# Altium PCB 十六路输入.PcbDoc (part 2 of 3)
Units mm, origin at the board's own origin, x right, y up, seen from the top; angles counter-clockwise.
Board outline 122.4 x 87.4 mm, 2 copper layers (Top Layer, Bottom Layer); 111 components, 112 nets, 343 pads, 40 vias.
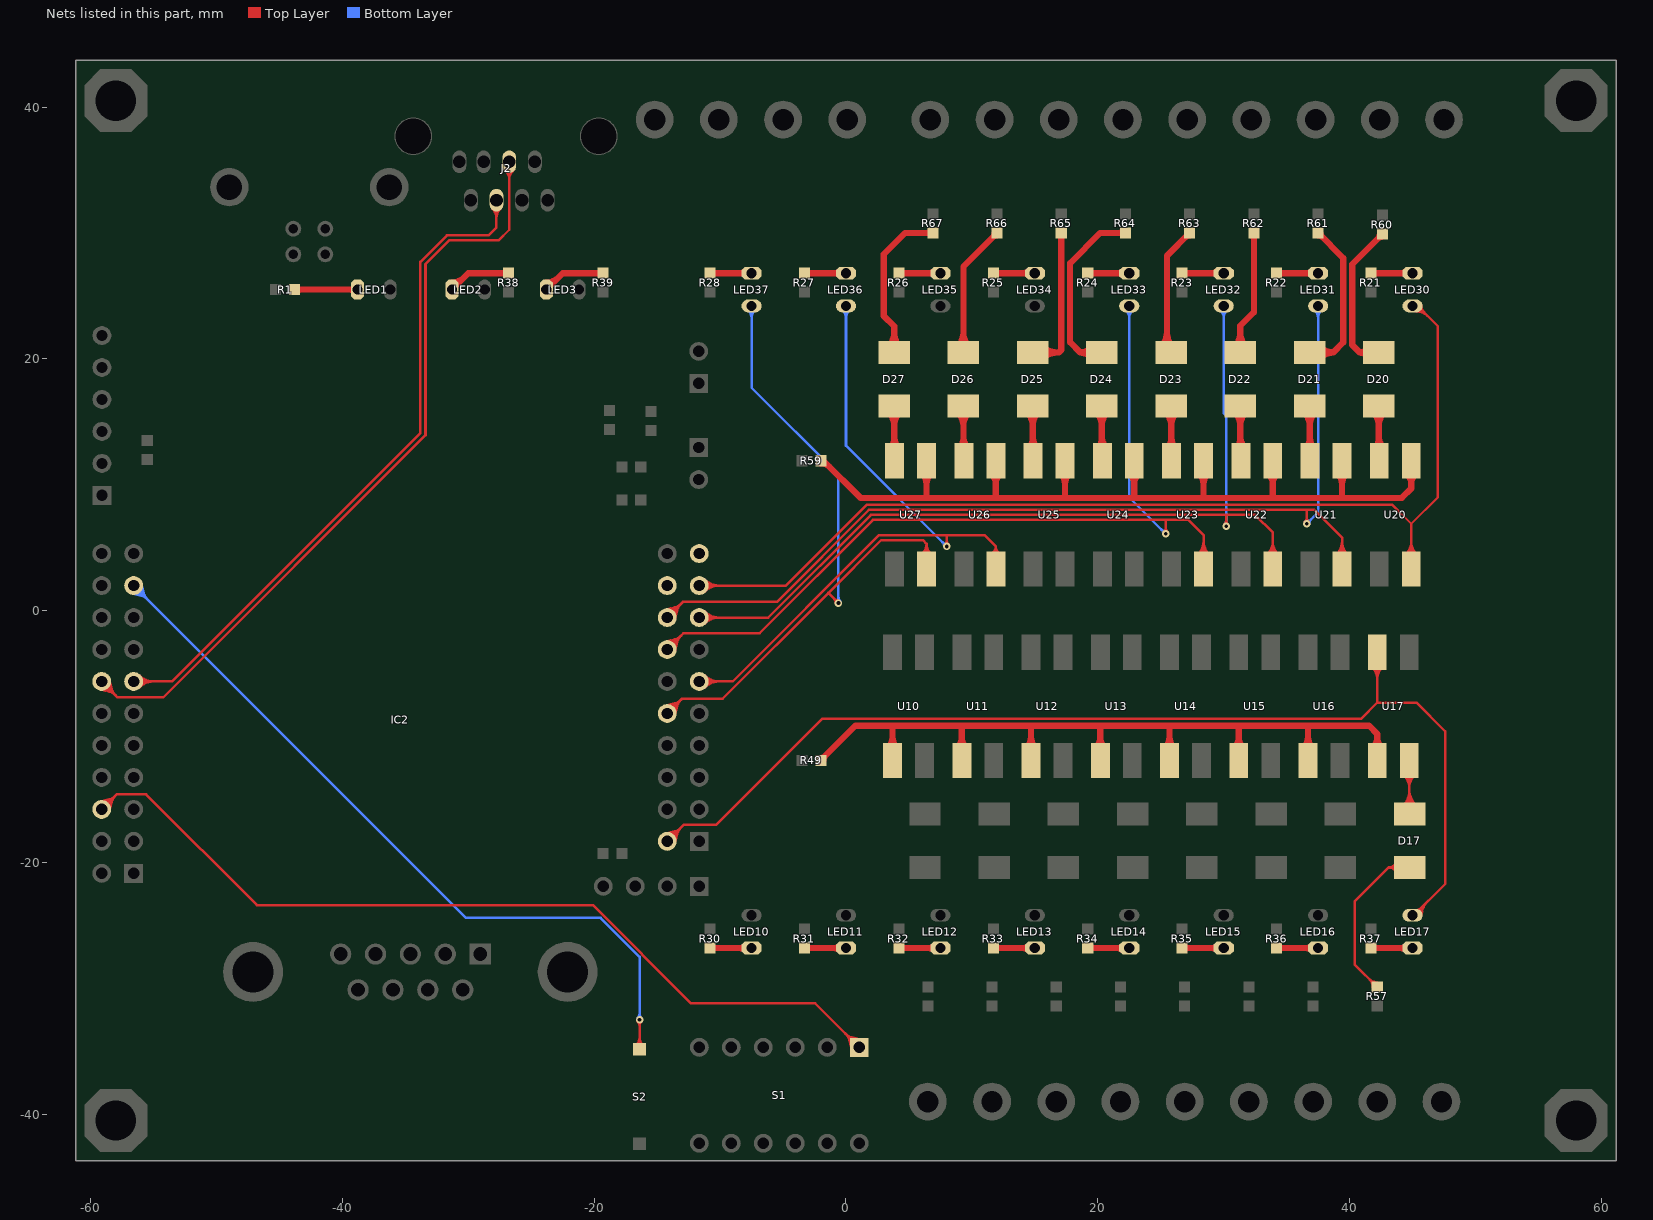
[diagram p2: the nets of this part, all layers, seen from the top]

## Via types
v1: diameter 0.6, hole 0.3, Top Layer to Bottom Layer, 40 vias

## Nets (pads, with @x,y where several pads share a name; then routed paths per layer and width w, separated by ;. In a path a pad name is that pad's centre, name@x,y a point inside that pad or via, vN(x,y) a via of type N, cw(c..) or ccw(c..) an arc to the next point about the centre after c; other vN are vias at no path point) (continued)
NetD17_A: D17.A U17.2 | length 25
  Top Layer w0.2: D17.A@44.74,-16.115 U17.2@44.74,-11.8 ; 44.74,-14.119 cw(c46.309,-14.119) 45.2,-13.01 ccw(c46.309,-14.119) 44.74,-14.119 ; 44.74,-14.119 ccw(c43.171,-14.119) 44.28,-13.01 cw(c43.171,-14.119) 44.74,-14.119 ; 44.74,-13.636 cw(c45.826,-13.636) 45.058,-12.868 ccw(c45.826,-13.636) 44.74,-13.636 ; 44.74,-13.636 ccw(c43.654,-13.636) 44.422,-12.868 cw(c43.654,-13.636) 44.74,-13.636 ; D17.A@44.209,-15.584 ccw(c42.928,-14.303) 44.74,-14.303 cw(c42.928,-14.303) D17.A@44.209,-15.584 ; D17.A@44.351,-15.726 ccw(c43.411,-14.786) 44.74,-14.786 cw(c43.411,-14.786) D17.A@44.351,-15.726 ; 44.74,-15.1 ccw(c45.825,-15.1) 45.058,-15.867 cw(c45.825,-15.1) 44.74,-15.1 ; 44.74,-14.617 ccw(c46.308,-14.617) 45.199,-15.726 cw(c46.308,-14.617) 44.74,-14.617 ; 44.74,-14.134 ccw(c46.791,-14.134) 45.341,-15.584 cw(c46.791,-14.134) 44.74,-14.134
NetD17_K: D17.K R57.1 | length 22.1
  Top Layer w0.2: R57.1@41.77,-29.565 ccw(c42.297,-29.424) R57.1@42.188,-29.959 ; R57.1@41.865,-29.47 cw(c41.724,-29.997) R57.1@42.259,-29.888 ; R57.1@42.2,-29.9 40.4,-28.1 40.4,-23.1 43.1,-20.4 ; D17.K@44.775,-20.4 43.1,-20.4 ; 41.62,-29.32 cw(c41.039,-29.9) 41.86,-29.9 ccw(c41.039,-29.9) 41.62,-29.32 ; 41.62,-29.32 ccw(c42.2,-28.739) 42.2,-29.56 cw(c42.2,-28.739) 41.62,-29.32 ; 43.1,-20.4 cw(c43.1,-21.097) 43.717,-20.773 ccw(c43.1,-21.097) 43.1,-20.4 ; 43.1,-20.4 ccw(c43.1,-19.703) 43.717,-20.027 cw(c43.1,-19.703) 43.1,-20.4 ; 43.431,-20.4 cw(c43.431,-20.923) 43.894,-20.679 ccw(c43.431,-20.923) 43.431,-20.4 ; 43.431,-20.4 ccw(c43.431,-19.877) 43.894,-20.121 cw(c43.431,-19.877) 43.431,-20.4
NetD20_A: D20.A U20.2 | length 13.1
  Top Layer w0.5: D20.A@42.325,16.25 42.325,11.935 U20.2@42.36,11.9 ; 42.325,14.681 cw(c43.894,14.681) 42.785,15.79 ccw(c43.894,14.681) 42.325,14.681 ; 42.325,14.681 ccw(c40.756,14.681) 41.865,15.79 cw(c40.756,14.681) 42.325,14.681 ; U20.2@42.006,12.904 ccw(c41.237,13.673) 42.325,13.673 cw(c41.237,13.673) U20.2@42.006,12.904 ; 42.325,13.842 ccw(c43.652,13.842) 42.714,12.904 cw(c43.652,13.842) 42.325,13.842
NetD20_K: D20.K R60.1 | length 16.6
  Top Layer w0.5: D20.K@42.325,20.5 40.8,20.5 ; R60.1@42.6,29.9 40.2,27.5 40.2,21.1 40.8,20.5 ; 40.8,20.5 cw(c40.8,19.763) 41.424,20.155 ccw(c40.8,19.763) 40.8,20.5 ; 40.8,20.5 ccw(c40.8,21.237) 41.424,20.845 cw(c40.8,21.237) 40.8,20.5 ; R60.1@42.276,29.576 cw(c42.6,29.251) 42.6,29.71 ccw(c42.6,29.251) R60.1@42.276,29.576 ; R60.1@42.276,29.576 ccw(c41.951,29.9) 42.41,29.9 cw(c41.951,29.9) R60.1@42.276,29.576
NetD21_A: D21.A U21.2 | length 13.1
  Top Layer w0.5: D21.A@36.825,16.25 36.825,11.935 U21.2@36.86,11.9 ; 36.825,14.681 cw(c38.394,14.681) 37.285,15.79 ccw(c38.394,14.681) 36.825,14.681 ; 36.825,14.681 ccw(c35.256,14.681) 36.365,15.79 cw(c35.256,14.681) 36.825,14.681 ; U21.2@36.506,12.904 ccw(c35.737,13.673) 36.825,13.673 cw(c35.737,13.673) U21.2@36.506,12.904 ; 36.825,13.842 ccw(c38.152,13.842) 37.214,12.904 cw(c38.152,13.842) 36.825,13.842
NetD21_K: D21.K R61.1 | length 18.7
  Top Layer w0.5: D21.K@36.825,20.5 38.7,20.5 ; R61.1@37.5,30 39.5,28 39.5,21.3 38.7,20.5 ; R61.1@37.824,29.676 cw(c38.149,30) 37.69,30 ccw(c38.149,30) R61.1@37.824,29.676 ; R61.1@37.824,29.676 ccw(c37.5,29.351) 37.5,29.81 cw(c37.5,29.351) R61.1@37.824,29.676 ; 38.7,20.5 cw(c38.7,21.964) 37.644,20.95 ccw(c38.7,21.964) 38.7,20.5 ; 38.7,20.5 ccw(c38.7,19.036) 37.644,20.05 cw(c38.7,19.036) 38.7,20.5
NetD22_A: D22.A U22.2 | length 13.1
  Top Layer w0.5: D22.A@31.325,16.25 31.325,11.935 U22.2@31.36,11.9 ; 31.325,14.681 cw(c32.894,14.681) 31.785,15.79 ccw(c32.894,14.681) 31.325,14.681 ; 31.325,14.681 ccw(c29.756,14.681) 30.865,15.79 cw(c29.756,14.681) 31.325,14.681 ; U22.2@31.006,12.904 ccw(c30.237,13.673) 31.325,13.673 cw(c30.237,13.673) U22.2@31.006,12.904 ; 31.325,13.842 ccw(c32.652,13.842) 31.714,12.904 cw(c32.652,13.842) 31.325,13.842
NetD22_K: D22.K R62.1 | length 16.3
  Top Layer w0.5: D22.K@31.325,20.5 31.325,22.625 32.4,23.7 R62.1@32.4,30 ; 31.325,22.069 cw(c29.756,22.069) 30.865,20.96 ccw(c29.756,22.069) 31.325,22.069 ; 31.325,22.069 ccw(c32.894,22.069) 31.785,20.96 cw(c32.894,22.069) 31.325,22.069 ; 32.4,29.541 cw(c32.859,29.541) 32.534,29.866 ccw(c32.859,29.541) 32.4,29.541 ; 32.4,29.541 ccw(c31.941,29.541) 32.266,29.866 cw(c31.941,29.541) 32.4,29.541
NetD23_A: D23.A U23.2 | length 13
  Top Layer w0.5: U23.2@25.825,11.935 D23.A@25.825,16.25 ; 25.825,14.681 cw(c27.394,14.681) 26.285,15.79 ccw(c27.394,14.681) 25.825,14.681 ; 25.825,14.681 ccw(c24.256,14.681) 25.365,15.79 cw(c24.256,14.681) 25.825,14.681 ; U23.2@25.506,12.904 ccw(c24.737,13.673) 25.825,13.673 cw(c24.737,13.673) U23.2@25.506,12.904 ; 25.825,13.842 ccw(c27.152,13.842) 26.214,12.904 cw(c27.152,13.842) 25.825,13.842
NetD23_K: D23.K R63.1 | length 16.8
  Top Layer w0.5: D23.K@25.825,20.5 25.5,20.825 25.5,28.2 R63.1@27.3,30 ; R63.1@26.976,29.676 cw(c27.3,29.351) 27.3,29.81 ccw(c27.3,29.351) R63.1@26.976,29.676 ; R63.1@26.976,29.676 ccw(c26.651,30) 27.11,30 cw(c26.651,30) R63.1@26.976,29.676 ; D23.K@25.015,20.96 ccw(c23.845,22.13) 25.5,22.13 cw(c23.845,22.13) D23.K@25.015,20.96 ; 25.5,22.009 ccw(c26.984,22.009) 25.935,20.96 cw(c26.984,22.009) 25.5,22.009
NetD24_A: D24.A U24.2 | length 13
  Top Layer w0.5: U24.2@20.325,11.935 D24.A@20.325,16.25 ; 20.325,14.681 cw(c21.894,14.681) 20.785,15.79 ccw(c21.894,14.681) 20.325,14.681 ; 20.325,14.681 ccw(c18.756,14.681) 19.865,15.79 cw(c18.756,14.681) 20.325,14.681 ; U24.2@20.006,12.904 ccw(c19.237,13.673) 20.325,13.673 cw(c19.237,13.673) U24.2@20.006,12.904 ; 20.325,13.842 ccw(c21.652,13.842) 20.714,12.904 cw(c21.652,13.842) 20.325,13.842
NetD24_K: D24.K R64.1 | length 20
  Top Layer w0.5: D24.K@20.325,20.5 18.6,20.5 17.8,21.3 17.8,27.6 20.2,30 R64.1@22.2,30 ; 18.6,20.5 cw(c18.6,19.371) 19.473,20.087 ccw(c18.6,19.371) 18.6,20.5 ; 18.6,20.5 ccw(c18.6,21.629) 19.473,20.913 cw(c18.6,21.629) 18.6,20.5 ; 21.741,30 cw(c21.741,29.541) 22.066,29.866 ccw(c21.741,29.541) 21.741,30 ; 21.741,30 ccw(c21.741,30.459) 22.066,30.134 cw(c21.741,30.459) 21.741,30
NetD25_A: D25.A U25.2 | length 13
  Top Layer w0.5: U25.2@14.825,11.935 D25.A@14.825,16.25 ; 14.825,14.681 cw(c16.394,14.681) 15.285,15.79 ccw(c16.394,14.681) 14.825,14.681 ; 14.825,14.681 ccw(c13.256,14.681) 14.365,15.79 cw(c13.256,14.681) 14.825,14.681 ; U25.2@14.506,12.904 ccw(c13.737,13.673) 14.825,13.673 cw(c13.737,13.673) U25.2@14.506,12.904 ; 14.825,13.842 ccw(c16.152,13.842) 15.214,12.904 cw(c16.152,13.842) 14.825,13.842
NetD25_K: D25.K R65.1 | length 18
  Top Layer w0.5: D25.K@14.825,20.5 16.9,20.5 17.1,20.7 R65.1@17.1,30 ; 16.744,20.5 cw(c16.744,22.069) 15.635,20.96 ccw(c16.744,22.069) 16.744,20.5 ; 16.744,20.5 ccw(c16.744,18.931) 15.635,20.04 cw(c16.744,18.931) 16.744,20.5 ; 17.1,29.541 cw(c17.559,29.541) 17.234,29.866 ccw(c17.559,29.541) 17.1,29.541 ; 17.1,29.541 ccw(c16.641,29.541) 16.966,29.866 cw(c16.641,29.541) 17.1,29.541
NetD26_A: D26.A U26.2 | length 13
  Top Layer w0.5: U26.2@9.325,11.935 D26.A@9.325,16.25 ; 9.325,14.681 cw(c10.894,14.681) 9.785,15.79 ccw(c10.894,14.681) 9.325,14.681 ; 9.325,14.681 ccw(c7.756,14.681) 8.865,15.79 cw(c7.756,14.681) 9.325,14.681 ; U26.2@9.006,12.904 ccw(c8.237,13.673) 9.325,13.673 cw(c8.237,13.673) U26.2@9.006,12.904 ; 9.325,13.842 ccw(c10.652,13.842) 9.714,12.904 cw(c10.652,13.842) 9.325,13.842
NetD26_K: D26.K R66.1 | length 17
  Top Layer w0.5: D26.K@9.325,20.5 9.325,27.325 R66.1@12,30 ; 9.325,22.069 cw(c7.756,22.069) 8.865,20.96 ccw(c7.756,22.069) 9.325,22.069 ; 9.325,22.069 ccw(c10.894,22.069) 9.785,20.96 cw(c10.894,22.069) 9.325,22.069 ; R66.1@11.676,29.676 cw(c12,29.351) 12,29.81 ccw(c12,29.351) R66.1@11.676,29.676 ; R66.1@11.676,29.676 ccw(c11.351,30) 11.81,30 cw(c11.351,30) R66.1@11.676,29.676
NetD27_A: D27.A U27.2 | length 13
  Top Layer w0.5: U27.2@3.825,11.935 D27.A@3.825,16.25 ; 3.825,14.681 cw(c5.394,14.681) 4.285,15.79 ccw(c5.394,14.681) 3.825,14.681 ; 3.825,14.681 ccw(c2.256,14.681) 3.365,15.79 cw(c2.256,14.681) 3.825,14.681 ; U27.2@3.506,12.904 ccw(c2.737,13.673) 3.825,13.673 cw(c2.737,13.673) U27.2@3.506,12.904 ; 3.825,13.842 ccw(c5.152,13.842) 4.214,12.904 cw(c5.152,13.842) 3.825,13.842
NetD27_K: D27.K R67.1 | length 19.1
  Top Layer w0.5: D27.K@3.825,20.5 3.825,22.575 3,23.4 3,28.3 4.7,30 R67.1@6.9,30 ; 3.825,22.069 cw(c2.256,22.069) 3.365,20.96 ccw(c2.256,22.069) 3.825,22.069 ; 3.825,22.069 ccw(c5.394,22.069) 4.285,20.96 cw(c5.394,22.069) 3.825,22.069 ; 6.441,30 cw(c6.441,29.541) 6.766,29.866 ccw(c6.441,29.541) 6.441,30 ; 6.441,30 ccw(c6.441,30.459) 6.766,30.134 cw(c6.441,30.459) 6.441,30
NetLED1_A: LED1.A R1.2 | length 8.4
  Top Layer w0.5: R1.2@-43.8,25.5 LED1.A@-38.8,25.5 ; -43.341,25.5 cw(c-43.341,25.959) -43.666,25.634 ccw(c-43.341,25.959) -43.341,25.5 ; -43.341,25.5 ccw(c-43.341,25.041) -43.666,25.366 cw(c-43.341,25.041) -43.341,25.5 ; -39.423,25.5 cw(c-39.423,24.877) -38.982,25.318 ccw(c-39.423,24.877) -39.423,25.5 ; -39.423,25.5 ccw(c-39.423,26.123) -38.982,25.682 cw(c-39.423,26.123) -39.423,25.5
NetLED2_A: LED2.A R38.2 | length 7.5
  Top Layer w0.5: LED2.A@-31.3,25.5 -30,26.8 R38.2@-26.8,26.8 ; LED2.A@-31.3,26.05 ccw(c-31.3,27.378) -30.361,26.439 ; -27.259,26.8 cw(c-27.259,26.341) -26.934,26.666 ccw(c-27.259,26.341) -27.259,26.8 ; -27.259,26.8 ccw(c-27.259,27.259) -26.934,26.934 cw(c-27.259,27.259) -27.259,26.8
NetLED3_A: LED3.A R39.2 | length 7.5
  Top Layer w0.5: LED3.A@-23.8,25.5 -22.5,26.8 R39.2@-19.3,26.8 ; LED3.A@-23.8,26.05 ccw(c-23.8,27.378) -22.861,26.439 ; -19.759,26.8 cw(c-19.759,26.341) -19.434,26.666 ccw(c-19.759,26.341) -19.759,26.8 ; -19.759,26.8 ccw(c-19.759,27.259) -19.434,26.934 cw(c-19.759,27.259) -19.759,26.8
NetLED10_A: LED10.A R30.2 | length 6.7
  Top Layer w0.5: R30.2@-10.8,-26.8 LED10.A@-7.5,-26.8 ; -10.341,-26.8 cw(c-10.341,-26.341) -10.666,-26.666 ccw(c-10.341,-26.341) -10.341,-26.8 ; -10.341,-26.8 ccw(c-10.341,-27.259) -10.666,-26.934 cw(c-10.341,-27.259) -10.341,-26.8 ; -8.415,-26.8 cw(c-8.415,-27.423) -7.975,-26.982 ccw(c-8.415,-27.423) -8.415,-26.8 ; -8.415,-26.8 ccw(c-8.415,-26.177) -7.975,-26.618 cw(c-8.415,-26.177) -8.415,-26.8
NetLED11_A: LED11.A R31.2 | length 6.7
  Top Layer w0.5: R31.2@-3.3,-26.8 LED11.A@0,-26.8 ; -2.841,-26.8 cw(c-2.841,-26.341) -3.166,-26.666 ccw(c-2.841,-26.341) -2.841,-26.8 ; -2.841,-26.8 ccw(c-2.841,-27.259) -3.166,-26.934 cw(c-2.841,-27.259) -2.841,-26.8 ; -0.915,-26.8 cw(c-0.915,-27.423) -0.475,-26.982 ccw(c-0.915,-27.423) -0.915,-26.8 ; -0.915,-26.8 ccw(c-0.915,-26.177) -0.475,-26.618 cw(c-0.915,-26.177) -0.915,-26.8
NetLED12_A: LED12.A R32.2 | length 6.7
  Top Layer w0.5: R32.2@4.2,-26.8 LED12.A@7.5,-26.8 ; 4.659,-26.8 cw(c4.659,-26.341) 4.334,-26.666 ccw(c4.659,-26.341) 4.659,-26.8 ; 4.659,-26.8 ccw(c4.659,-27.259) 4.334,-26.934 cw(c4.659,-27.259) 4.659,-26.8 ; 6.585,-26.8 cw(c6.585,-27.423) 7.025,-26.982 ccw(c6.585,-27.423) 6.585,-26.8 ; 6.585,-26.8 ccw(c6.585,-26.177) 7.025,-26.618 cw(c6.585,-26.177) 6.585,-26.8
NetLED13_A: LED13.A R33.2 | length 6.7
  Top Layer w0.5: R33.2@11.7,-26.8 LED13.A@15,-26.8 ; 12.159,-26.8 cw(c12.159,-26.341) 11.834,-26.666 ccw(c12.159,-26.341) 12.159,-26.8 ; 12.159,-26.8 ccw(c12.159,-27.259) 11.834,-26.934 cw(c12.159,-27.259) 12.159,-26.8 ; 14.085,-26.8 cw(c14.085,-27.423) 14.525,-26.982 ccw(c14.085,-27.423) 14.085,-26.8 ; 14.085,-26.8 ccw(c14.085,-26.177) 14.525,-26.618 cw(c14.085,-26.177) 14.085,-26.8
NetLED14_A: LED14.A R34.2 | length 6.7
  Top Layer w0.5: R34.2@19.2,-26.8 LED14.A@22.5,-26.8 ; 19.659,-26.8 cw(c19.659,-26.341) 19.334,-26.666 ccw(c19.659,-26.341) 19.659,-26.8 ; 19.659,-26.8 ccw(c19.659,-27.259) 19.334,-26.934 cw(c19.659,-27.259) 19.659,-26.8 ; 21.585,-26.8 cw(c21.585,-27.423) 22.025,-26.982 ccw(c21.585,-27.423) 21.585,-26.8 ; 21.585,-26.8 ccw(c21.585,-26.177) 22.025,-26.618 cw(c21.585,-26.177) 21.585,-26.8
NetLED15_A: LED15.A R35.2 | length 6.7
  Top Layer w0.5: R35.2@26.7,-26.8 LED15.A@30,-26.8 ; 27.159,-26.8 cw(c27.159,-26.341) 26.834,-26.666 ccw(c27.159,-26.341) 27.159,-26.8 ; 27.159,-26.8 ccw(c27.159,-27.259) 26.834,-26.934 cw(c27.159,-27.259) 27.159,-26.8 ; 29.085,-26.8 cw(c29.085,-27.423) 29.525,-26.982 ccw(c29.085,-27.423) 29.085,-26.8 ; 29.085,-26.8 ccw(c29.085,-26.177) 29.525,-26.618 cw(c29.085,-26.177) 29.085,-26.8
NetLED16_A: LED16.A R36.2 | length 6.7
  Top Layer w0.5: R36.2@34.2,-26.8 LED16.A@37.5,-26.8 ; 34.659,-26.8 cw(c34.659,-26.341) 34.334,-26.666 ccw(c34.659,-26.341) 34.659,-26.8 ; 34.659,-26.8 ccw(c34.659,-27.259) 34.334,-26.934 cw(c34.659,-27.259) 34.659,-26.8 ; 36.585,-26.8 cw(c36.585,-27.423) 37.025,-26.982 ccw(c36.585,-27.423) 36.585,-26.8 ; 36.585,-26.8 ccw(c36.585,-26.177) 37.025,-26.618 cw(c36.585,-26.177) 36.585,-26.8
NetLED17_A: LED17.A R37.2 | length 6.7
  Top Layer w0.5: R37.2@41.7,-26.8 LED17.A@45,-26.8 ; 42.159,-26.8 cw(c42.159,-26.341) 41.834,-26.666 ccw(c42.159,-26.341) 42.159,-26.8 ; 42.159,-26.8 ccw(c42.159,-27.259) 41.834,-26.934 cw(c42.159,-27.259) 42.159,-26.8 ; 44.085,-26.8 cw(c44.085,-27.423) 44.525,-26.982 ccw(c44.085,-27.423) 44.085,-26.8 ; 44.085,-26.8 ccw(c44.085,-26.177) 44.525,-26.618 cw(c44.085,-26.177) 44.085,-26.8
NetLED30_A: LED30.A R21.2 | length 6.7
  Top Layer w0.5: R21.2@41.7,26.8 LED30.A@45,26.8 ; 42.159,26.8 cw(c42.159,27.259) 41.834,26.934 ccw(c42.159,27.259) 42.159,26.8 ; 42.159,26.8 ccw(c42.159,26.341) 41.834,26.666 cw(c42.159,26.341) 42.159,26.8 ; 44.085,26.8 cw(c44.085,26.177) 44.525,26.618 ccw(c44.085,26.177) 44.085,26.8 ; 44.085,26.8 ccw(c44.085,27.423) 44.525,26.982 cw(c44.085,27.423) 44.085,26.8
NetLED31_A: LED31.A R22.2 | length 6.7
  Top Layer w0.5: R22.2@34.2,26.8 LED31.A@37.5,26.8 ; 34.659,26.8 cw(c34.659,27.259) 34.334,26.934 ccw(c34.659,27.259) 34.659,26.8 ; 34.659,26.8 ccw(c34.659,26.341) 34.334,26.666 cw(c34.659,26.341) 34.659,26.8 ; 36.585,26.8 cw(c36.585,26.177) 37.025,26.618 ccw(c36.585,26.177) 36.585,26.8 ; 36.585,26.8 ccw(c36.585,27.423) 37.025,26.982 cw(c36.585,27.423) 36.585,26.8
NetLED32_A: LED32.A R23.2 | length 6.7
  Top Layer w0.5: R23.2@26.7,26.8 LED32.A@30,26.8 ; 27.159,26.8 cw(c27.159,27.259) 26.834,26.934 ccw(c27.159,27.259) 27.159,26.8 ; 27.159,26.8 ccw(c27.159,26.341) 26.834,26.666 cw(c27.159,26.341) 27.159,26.8 ; 29.085,26.8 cw(c29.085,26.177) 29.525,26.618 ccw(c29.085,26.177) 29.085,26.8 ; 29.085,26.8 ccw(c29.085,27.423) 29.525,26.982 cw(c29.085,27.423) 29.085,26.8
NetLED33_A: LED33.A R24.2 | length 6.7
  Top Layer w0.5: R24.2@19.2,26.8 LED33.A@22.5,26.8 ; 19.659,26.8 cw(c19.659,27.259) 19.334,26.934 ccw(c19.659,27.259) 19.659,26.8 ; 19.659,26.8 ccw(c19.659,26.341) 19.334,26.666 cw(c19.659,26.341) 19.659,26.8 ; 21.585,26.8 cw(c21.585,26.177) 22.025,26.618 ccw(c21.585,26.177) 21.585,26.8 ; 21.585,26.8 ccw(c21.585,27.423) 22.025,26.982 cw(c21.585,27.423) 21.585,26.8
NetLED34_A: LED34.A R25.2 | length 6.7
  Top Layer w0.5: R25.2@11.7,26.8 LED34.A@15,26.8 ; 12.159,26.8 cw(c12.159,27.259) 11.834,26.934 ccw(c12.159,27.259) 12.159,26.8 ; 12.159,26.8 ccw(c12.159,26.341) 11.834,26.666 cw(c12.159,26.341) 12.159,26.8 ; 14.085,26.8 cw(c14.085,26.177) 14.525,26.618 ccw(c14.085,26.177) 14.085,26.8 ; 14.085,26.8 ccw(c14.085,27.423) 14.525,26.982 cw(c14.085,27.423) 14.085,26.8
NetLED35_A: LED35.A R26.2 | length 6.7
  Top Layer w0.5: R26.2@4.2,26.8 LED35.A@7.5,26.8 ; 4.659,26.8 cw(c4.659,27.259) 4.334,26.934 ccw(c4.659,27.259) 4.659,26.8 ; 4.659,26.8 ccw(c4.659,26.341) 4.334,26.666 cw(c4.659,26.341) 4.659,26.8 ; 6.585,26.8 cw(c6.585,26.177) 7.025,26.618 ccw(c6.585,26.177) 6.585,26.8 ; 6.585,26.8 ccw(c6.585,27.423) 7.025,26.982 cw(c6.585,27.423) 6.585,26.8
NetLED36_A: LED36.A R27.2 | length 6.7
  Top Layer w0.5: R27.2@-3.3,26.8 LED36.A@0,26.8 ; -2.841,26.8 cw(c-2.841,27.259) -3.166,26.934 ccw(c-2.841,27.259) -2.841,26.8 ; -2.841,26.8 ccw(c-2.841,26.341) -3.166,26.666 cw(c-2.841,26.341) -2.841,26.8 ; -0.915,26.8 cw(c-0.915,26.177) -0.475,26.618 ccw(c-0.915,26.177) -0.915,26.8 ; -0.915,26.8 ccw(c-0.915,27.423) -0.475,26.982 cw(c-0.915,27.423) -0.915,26.8
NetLED37_A: LED37.A R28.2 | length 6.7
  Top Layer w0.5: R28.2@-10.8,26.8 LED37.A@-7.5,26.8 ; -10.341,26.8 cw(c-10.341,27.259) -10.666,26.934 ccw(c-10.341,27.259) -10.341,26.8 ; -10.341,26.8 ccw(c-10.341,26.341) -10.666,26.666 cw(c-10.341,26.341) -10.341,26.8 ; -8.415,26.8 cw(c-8.415,26.177) -7.975,26.618 ccw(c-8.415,26.177) -8.415,26.8 ; -8.415,26.8 ccw(c-8.415,27.423) -7.975,26.982 cw(c-8.415,27.423) -8.415,26.8
NetR49_1: R49.1 U10.1 U11.1 U12.1 U13.1 U14.1 U15.1 U16.1 U17.1 | length 98.5
  Top Layer w0.5: R49.1@-2,-11.9 0.75,-9.15 3.7,-9.15 ; U10.1@3.7,-11.9 3.7,-9.15 ; U11.1@9.2,-11.9 9.2,-9.15 ; U12.1@14.7,-11.9 14.7,-9.15 ; U13.1@20.2,-11.9 20.2,-9.15 ; U14.1@25.7,-11.9 25.7,-9.15 ; U15.1@31.2,-11.9 31.2,-9.15 ; U16.1@36.7,-11.8 36.7,-9.15 ; U17.1@42.2,-11.8 42.2,-9.8 41.55,-9.15 36.7,-9.15 ; R49.1@-1.676,-11.576 cw(c-2,-11.251) -2,-11.71 ccw(c-2,-11.251) R49.1@-1.676,-11.576 ; R49.1@-1.676,-11.576 ccw(c-1.351,-11.9) -1.81,-11.9 cw(c-1.351,-11.9) R49.1@-1.676,-11.576 ; 3.7,-10.043 cw(c2.493,-10.043) 3.346,-10.896 ccw(c2.493,-10.043) 3.7,-10.043 ; 3.7,-10.043 ccw(c4.907,-10.043) 4.054,-10.896 cw(c4.907,-10.043) 3.7,-10.043 ; 3.7,-9.15 9.2,-9.15 ; 9.2,-10.043 cw(c7.993,-10.043) 8.846,-10.896 ccw(c7.993,-10.043) 9.2,-10.043 ; 9.2,-10.043 ccw(c10.407,-10.043) 9.554,-10.896 cw(c10.407,-10.043) 9.2,-10.043 ; 9.2,-9.15 14.7,-9.15 ; 14.7,-10.043 cw(c13.493,-10.043) 14.346,-10.896 ccw(c13.493,-10.043) 14.7,-10.043 ; 14.7,-10.043 ccw(c15.907,-10.043) 15.054,-10.896 cw(c15.907,-10.043) 14.7,-10.043 ; 14.7,-9.15 20.2,-9.15 ; 20.2,-10.043 cw(c18.993,-10.043) 19.846,-10.896 ccw(c18.993,-10.043) 20.2,-10.043 ; 20.2,-10.043 ccw(c21.407,-10.043) 20.554,-10.896 cw(c21.407,-10.043) 20.2,-10.043 ; 20.2,-9.15 25.7,-9.15 ; 25.7,-10.043 cw(c24.493,-10.043) 25.346,-10.896 ccw(c24.493,-10.043) 25.7,-10.043 ; 25.7,-10.043 ccw(c26.907,-10.043) 26.054,-10.896 cw(c26.907,-10.043) 25.7,-10.043 ; 25.7,-9.15 31.2,-9.15 ; 31.2,-10.043 cw(c29.993,-10.043) 30.846,-10.896 ccw(c29.993,-10.043) 31.2,-10.043 ; 31.2,-10.043 ccw(c32.407,-10.043) 31.554,-10.896 cw(c32.407,-10.043) 31.2,-10.043 ; 31.2,-9.15 36.7,-9.15 ; 36.7,-10.043 cw(c35.493,-10.043) 36.346,-10.896 ccw(c35.493,-10.043) 36.7,-10.043 ; 36.7,-10.043 ccw(c37.907,-10.043) 37.054,-10.896 cw(c37.907,-10.043) 36.7,-10.043 ; 42.2,-10.043 cw(c40.993,-10.043) 41.846,-10.896 ccw(c40.993,-10.043) 42.2,-10.043 ; 42.2,-10.043 ccw(c43.407,-10.043) 42.554,-10.896 cw(c43.407,-10.043) 42.2,-10.043
NetR59_1: R59.1 U20.1 U21.1 U22.1 U23.1 U24.1 U25.1 U26.1 U27.1 | length 102.9
  Top Layer w0.5: R59.1@-1.8,11.9 1.15,8.95 6.4,8.95 ; U27.1@6.4,11.9 6.4,8.95 ; U26.1@11.9,11.9 11.9,8.95 ; U25.1@17.4,11.9 17.4,8.95 ; U24.1@22.9,11.9 22.9,8.95 ; U23.1@28.4,11.9 28.4,8.95 ; U22.1@33.9,11.9 33.9,8.95 ; U21.1@39.4,11.9 39.4,8.95 ; U20.1@44.9,11.9 44.9,9.7 44.15,8.95 39.4,8.95 ; 6.4,8.95 11.9,8.95 ; 6.4,10.043 cw(c7.607,10.043) 6.754,10.896 ccw(c7.607,10.043) 6.4,10.043 ; 6.4,10.043 ccw(c5.193,10.043) 6.046,10.896 cw(c5.193,10.043) 6.4,10.043 ; 11.9,8.95 17.4,8.95 ; 11.9,10.043 cw(c13.107,10.043) 12.254,10.896 ccw(c13.107,10.043) 11.9,10.043 ; 11.9,10.043 ccw(c10.693,10.043) 11.546,10.896 cw(c10.693,10.043) 11.9,10.043 ; 17.4,8.95 22.9,8.95 ; 17.4,10.043 cw(c18.607,10.043) 17.754,10.896 ccw(c18.607,10.043) 17.4,10.043 ; 17.4,10.043 ccw(c16.193,10.043) 17.046,10.896 cw(c16.193,10.043) 17.4,10.043 ; 22.9,8.95 28.4,8.95 ; 22.9,10.043 cw(c24.107,10.043) 23.254,10.896 ccw(c24.107,10.043) 22.9,10.043 ; 22.9,10.043 ccw(c21.693,10.043) 22.546,10.896 cw(c21.693,10.043) 22.9,10.043 ; 28.4,8.95 33.9,8.95 ; 28.4,10.043 cw(c29.607,10.043) 28.754,10.896 ccw(c29.607,10.043) 28.4,10.043 ; 28.4,10.043 ccw(c27.193,10.043) 28.046,10.896 cw(c27.193,10.043) 28.4,10.043 ; 33.9,8.95 39.4,8.95 ; 33.9,10.043 cw(c35.107,10.043) 34.254,10.896 ccw(c35.107,10.043) 33.9,10.043 ; 33.9,10.043 ccw(c32.693,10.043) 33.546,10.896 cw(c32.693,10.043) 33.9,10.043 ; 39.4,10.043 cw(c40.607,10.043) 39.754,10.896 ccw(c40.607,10.043) 39.4,10.043 ; 39.4,10.043 ccw(c38.193,10.043) 39.046,10.896 cw(c38.193,10.043) 39.4,10.043 ; 44.9,10.043 cw(c46.107,10.043) 45.254,10.896 ccw(c46.107,10.043) 44.9,10.043 ; 44.9,10.043 ccw(c43.693,10.043) 44.546,10.896 cw(c43.693,10.043) 44.9,10.043 ; R59.1@-2,11.71 cw(c-2,10.768) -1.334,11.434 ccw(c-2,10.768) R59.1@-2,11.71
NRST: IC2.19 S2.1 | length 78.3
  Top Layer w0.2: S2.1@-16.4,-34.85 v1(-16.4,-32.5) ; -16.4,-33.884 cw(c-17.366,-33.884) -16.683,-34.567 ccw(c-17.366,-33.884) -16.4,-33.884 ; -16.4,-33.884 ccw(c-15.434,-33.884) -16.117,-34.567 cw(c-15.434,-33.884) -16.4,-33.884 ; -16.4,-32.983 cw(c-15.917,-32.983) -16.259,-32.641 ccw(c-15.917,-32.983) -16.4,-32.983 ; -16.4,-32.983 ccw(c-16.883,-32.983) -16.541,-32.641 cw(c-16.883,-32.983) -16.4,-32.983
  Bottom Layer w0.2: IC2.19@-56.923,1.92 ccw(c-56.087,2.091) -56.308,1.267 ; IC2.19@-56.727,1.96 ccw(c-55.733,2.163) -55.996,1.183 ; IC2.19@-56.58,1.99 -30.19,-24.4 -19.5,-24.4 -16.4,-27.5 v1(-16.4,-32.5) ; IC2.19@-56.55,2.137 cw(c-56.753,1.143) -55.773,1.406 ; IC2.19@-56.51,2.333 cw(c-56.681,1.497) -55.857,1.718 ; -55.812,1.222 cw(c-55.044,1.99) -56.13,1.99 ccw(c-55.044,1.99) -55.812,1.222 ; -55.812,1.222 ccw(c-56.58,0.454) -56.58,1.54 cw(c-56.58,0.454) -55.812,1.222 ; -55.47,0.88 cw(c-54.361,1.99) -55.93,1.99 ccw(c-54.361,1.99) -55.47,0.88 ; -55.47,0.88 ccw(c-56.58,-0.229) -56.58,1.34 cw(c-56.58,-0.229) -55.47,0.88 ; -16.4,-32.017 cw(c-16.883,-32.017) -16.541,-32.359 ccw(c-16.883,-32.017) -16.4,-32.017 ; -16.4,-32.017 ccw(c-15.917,-32.017) -16.259,-32.359 cw(c-15.917,-32.017) -16.4,-32.017
PA0: IC2.25
PA1: IC2.24
PA4: IC2.26 LED30.K U20.4 | length 105
  Top Layer w0.2: IC2.26@-11.66,1.99 -4.77,1.99 1.64,8.4 43.4,8.4 44.9,6.9 ; U20.4@44.9,3.3 44.9,6.9 ; LED30.K@45.108,24.145 ccw(c45.698,24.32) 45.539,23.726 ; LED30.K@45.2,24.4 47,22.6 47,9 44.9,6.9 ; LED30.K@45.3,24.202 ccw(c46.1,24.44) 45.884,23.633 ; -10.574,1.99 cw(c-10.574,3.076) -11.342,2.308 ccw(c-10.574,3.076) -10.574,1.99 ; -10.574,1.99 ccw(c-10.574,0.904) -11.342,1.672 cw(c-10.574,0.904) -10.574,1.99 ; -10.091,1.99 cw(c-10.091,3.559) -11.2,2.45 ccw(c-10.091,3.559) -10.091,1.99 ; -10.091,1.99 ccw(c-10.091,0.421) -11.2,1.53 cw(c-10.091,0.421) -10.091,1.99 ; 44.9,5.036 cw(c43.814,5.036) 44.582,4.268 ccw(c43.814,5.036) 44.9,5.036 ; 44.9,5.036 ccw(c45.986,5.036) 45.218,4.268 cw(c45.986,5.036) 44.9,5.036 ; 44.9,5.519 cw(c43.331,5.519) 44.44,4.41 ccw(c43.331,5.519) 44.9,5.519 ; 44.9,5.519 ccw(c46.469,5.519) 45.36,4.41 cw(c46.469,5.519) 44.9,5.519 ; LED30.K@45.292,23.792 cw(c45.292,22.546) 46.173,23.427 ccw(c45.292,22.546) LED30.K@45.292,23.792 ; LED30.K@45.292,23.992 cw(c45.292,23.229) 45.831,23.769 ccw(c45.292,23.229) LED30.K@45.292,23.992 ; LED30.K@45.7,24.2 ccw(c46.425,24.2) 45.912,23.688 cw(c46.425,24.2) LED30.K@45.7,24.2
PA5: IC2.27 LED31.K U21.4 | length 107.9
  Top Layer w0.2: IC2.27@-14.543,-0.48 cw(c-13.707,-0.651) -13.928,0.173 ; IC2.27@-14.347,-0.52 cw(c-13.353,-0.723) -13.616,0.257 ; IC2.27@-14.201,-0.5 ccw(c-14.208,0.114) -13.615,-0.045 ; IC2.27@-14.2,-0.55 -12.95,0.7 -5.494,0.7 1.806,8 36.6,8 ; IC2.27@-14.17,-0.697 ccw(c-14.373,0.297) -13.393,0.034 ; IC2.27@-14.15,-0.551 cw(c-13.536,-0.558) -13.695,0.035 ; IC2.27@-14.13,-0.893 ccw(c-14.301,-0.057) -13.477,-0.278 ; v1(36.6,6.9) 36.6,8 ; U21.4@39.4,3.3 39.4,5.8 37.2,8 36.6,8 ; -13.432,0.218 cw(c-14.2,0.986) -14.2,-0.1 ccw(c-14.2,0.986) -13.432,0.218 ; -13.432,0.218 ccw(c-12.664,-0.55) -13.75,-0.55 cw(c-12.664,-0.55) -13.432,0.218 ; -13.09,0.56 cw(c-14.2,1.669) -14.2,0.1 ccw(c-14.2,1.669) -13.09,0.56 ; -13.09,0.56 ccw(c-11.981,-0.55) -13.55,-0.55 cw(c-11.981,-0.55) -13.09,0.56 ; 36.6,7.383 cw(c36.117,7.383) 36.459,7.041 ccw(c36.117,7.383) 36.6,7.383 ; 36.6,7.383 ccw(c37.083,7.383) 36.741,7.041 cw(c37.083,7.383) 36.6,7.383 ; 39.4,5.036 cw(c38.314,5.036) 39.082,4.268 ccw(c38.314,5.036) 39.4,5.036 ; 39.4,5.036 ccw(c40.486,5.036) 39.718,4.268 cw(c40.486,5.036) 39.4,5.036 ; 39.4,5.519 cw(c37.831,5.519) 38.94,4.41 ccw(c37.831,5.519) 39.4,5.519 ; 39.4,5.519 ccw(c40.969,5.519) 39.86,4.41 cw(c40.969,5.519) 39.4,5.519
  Bottom Layer w0.2: v1(36.6,6.9) 37.5,7.8 LED31.K@37.5,24.2 ; 36.941,7.241 cw(c36.6,7.583) 36.6,7.1 ccw(c36.6,7.583) 36.941,7.241 ; 36.941,7.241 ccw(c37.283,6.9) 36.8,6.9 cw(c37.283,6.9) 36.941,7.241 ; 37.5,23.215 cw(c38.485,23.215) 37.789,23.912 ccw(c38.485,23.215) 37.5,23.215 ; 37.5,23.215 ccw(c36.515,23.215) 37.212,23.912 cw(c36.515,23.215) 37.5,23.215
PA6: IC2.28 LED32.K U22.4 | length 93.7
  Top Layer w0.2: IC2.28@-11.66,-0.55 -6.178,-0.55 1.972,7.6 30.2,7.6 ; v1(30.2,6.7) 30.2,7.6 ; U22.4@33.9,3.3 33.9,6.2 32.5,7.6 30.2,7.6 ; -10.574,-0.55 cw(c-10.574,0.536) -11.342,-0.232 ccw(c-10.574,0.536) -10.574,-0.55 ; -10.574,-0.55 ccw(c-10.574,-1.636) -11.342,-0.868 cw(c-10.574,-1.636) -10.574,-0.55 ; -10.091,-0.55 cw(c-10.091,1.019) -11.2,-0.09 ccw(c-10.091,1.019) -10.091,-0.55 ; -10.091,-0.55 ccw(c-10.091,-2.119) -11.2,-1.01 cw(c-10.091,-2.119) -10.091,-0.55 ; 30.2,7.183 cw(c29.717,7.183) 30.059,6.841 ccw(c29.717,7.183) 30.2,7.183 ; 30.2,7.183 ccw(c30.683,7.183) 30.341,6.841 cw(c30.683,7.183) 30.2,7.183 ; 33.9,5.036 cw(c32.814,5.036) 33.582,4.268 ccw(c32.814,5.036) 33.9,5.036 ; 33.9,5.036 ccw(c34.986,5.036) 34.218,4.268 cw(c34.986,5.036) 33.9,5.036 ; 33.9,5.519 cw(c32.331,5.519) 33.44,4.41 ccw(c32.331,5.519) 33.9,5.519 ; 33.9,5.519 ccw(c35.469,5.519) 34.36,4.41 cw(c35.469,5.519) 33.9,5.519
  Bottom Layer w0.2: LED32.K@30,24.2 30,15.7 30.2,15.5 v1(30.2,6.7) ; 30,23.215 cw(c30.985,23.215) 30.289,23.912 ccw(c30.985,23.215) 30,23.215 ; 30,23.215 ccw(c29.015,23.215) 29.712,23.912 cw(c29.015,23.215) 30,23.215 ; 30.2,7.183 cw(c29.717,7.183) 30.059,6.841 ccw(c29.717,7.183) 30.2,7.183 ; 30.2,7.183 ccw(c30.683,7.183) 30.341,6.841 cw(c30.683,7.183) 30.2,7.183
PA7: IC2.29 LED33.K U23.4 | length 99
  Top Layer w0.2: IC2.29@-14.543,-3.02 cw(c-13.707,-3.191) -13.928,-2.367 ; IC2.29@-14.347,-3.06 cw(c-13.353,-3.263) -13.616,-2.283 ; IC2.29@-14.201,-3.04 ccw(c-14.208,-2.426) -13.615,-2.585 ; IC2.29@-14.2,-3.09 -12.91,-1.8 -6.863,-1.8 2.137,7.2 25.4,7.2 ; IC2.29@-14.17,-3.237 ccw(c-14.373,-2.243) -13.393,-2.506 ; IC2.29@-14.15,-3.091 cw(c-13.536,-3.098) -13.695,-2.505 ; IC2.29@-14.13,-3.433 ccw(c-14.301,-2.597) -13.477,-2.818 ; v1(25.4,6.1) 25.4,7.2 ; U23.4@28.4,3.3 28.4,6 27.2,7.2 25.4,7.2 ; -13.432,-2.322 cw(c-14.2,-1.554) -14.2,-2.64 ccw(c-14.2,-1.554) -13.432,-2.322 ; -13.432,-2.322 ccw(c-12.664,-3.09) -13.75,-3.09 cw(c-12.664,-3.09) -13.432,-2.322 ; -13.09,-1.98 cw(c-14.2,-0.871) -14.2,-2.44 ccw(c-14.2,-0.871) -13.09,-1.98 ; -13.09,-1.98 ccw(c-11.981,-3.09) -13.55,-3.09 cw(c-11.981,-3.09) -13.09,-1.98 ; 25.4,6.583 cw(c24.917,6.583) 25.259,6.241 ccw(c24.917,6.583) 25.4,6.583 ; 25.4,6.583 ccw(c25.883,6.583) 25.541,6.241 cw(c25.883,6.583) 25.4,6.583 ; 28.4,5.036 cw(c27.314,5.036) 28.082,4.268 ccw(c27.314,5.036) 28.4,5.036 ; 28.4,5.036 ccw(c29.486,5.036) 28.718,4.268 cw(c29.486,5.036) 28.4,5.036 ; 28.4,5.519 cw(c26.831,5.519) 27.94,4.41 ccw(c26.831,5.519) 28.4,5.519 ; 28.4,5.519 ccw(c29.969,5.519) 28.86,4.41 cw(c29.969,5.519) 28.4,5.519
  Bottom Layer w0.2: LED33.K@22.5,24.2 22.5,9 v1(25.4,6.1) ; 22.5,23.215 cw(c23.485,23.215) 22.789,23.912 ccw(c23.485,23.215) 22.5,23.215 ; 22.5,23.215 ccw(c21.515,23.215) 22.212,23.912 cw(c21.515,23.215) 22.5,23.215 ; 25.059,6.441 cw(c24.717,6.1) 25.2,6.1 ccw(c24.717,6.1) 25.059,6.441 ; 25.059,6.441 ccw(c25.4,6.783) 25.4,6.3 cw(c25.4,6.783) 25.059,6.441
PA8: IC2.41 LED17.K U17.4 | length 116.5
  Top Layer w0.2: IC2.41@-14.543,-18.26 cw(c-13.707,-18.431) -13.928,-17.607 ; IC2.41@-14.347,-18.3 cw(c-13.353,-18.503) -13.616,-17.523 ; IC2.41@-14.201,-18.28 ccw(c-14.208,-17.666) -13.615,-17.825 ; IC2.41@-14.2,-18.33 -12.87,-17 -10.3,-17 -1.9,-8.6 40.9,-8.6 42.2,-7.3 ; IC2.41@-14.17,-18.477 ccw(c-14.373,-17.483) -13.393,-17.746 ; IC2.41@-14.15,-18.331 cw(c-13.536,-18.338) -13.695,-17.745 ; IC2.41@-14.13,-18.673 ccw(c-14.301,-17.837) -13.477,-18.058 ; U17.4@42.2,-3.2 42.2,-7.3 ; LED17.K@45,-24.3 47.6,-21.7 47.6,-9.6 45.3,-7.3 42.2,-7.3 ; LED17.K@45.267,-23.994 ccw(c45.213,-23.552) 45.643,-23.667 ; LED17.K@45.289,-24.192 ccw(c44.972,-23.316) 45.872,-23.557 ; LED17.K@45.358,-24.381 ccw(c45.131,-23.756) 45.773,-23.928 ; 45.616,-23.769 ccw(c45.904,-23.846) LED17.K@45.645,-23.996 ; -13.432,-17.562 cw(c-14.2,-16.794) -14.2,-17.88 ccw(c-14.2,-16.794) -13.432,-17.562 ; -13.432,-17.562 ccw(c-12.664,-18.33) -13.75,-18.33 cw(c-12.664,-18.33) -13.432,-17.562 ; -13.09,-17.22 cw(c-14.2,-16.111) -14.2,-17.68 ccw(c-14.2,-16.111) -13.09,-17.22 ; -13.09,-17.22 ccw(c-11.981,-18.33) -13.55,-18.33 cw(c-11.981,-18.33) -13.09,-17.22 ; 42.2,-5.519 cw(c43.769,-5.519) 42.66,-4.41 ccw(c43.769,-5.519) 42.2,-5.519 ; 42.2,-5.519 ccw(c40.631,-5.519) 41.74,-4.41 cw(c40.631,-5.519) 42.2,-5.519 ; 42.2,-5.036 cw(c43.286,-5.036) 42.518,-4.268 ccw(c43.286,-5.036) 42.2,-5.036 ; 42.2,-5.036 ccw(c41.114,-5.036) 41.882,-4.268 cw(c41.114,-5.036) 42.2,-5.036 ; LED17.K@45.292,-23.792 ccw(c45.292,-23.271) 45.661,-23.639 cw(c45.292,-23.271) LED17.K@45.292,-23.792 ; LED17.K@45.5,-24.2 cw(c46.466,-24.2) 45.783,-23.517 ccw(c46.466,-24.2) LED17.K@45.5,-24.2 ; LED17.K@45.7,-24.2 cw(c47.149,-24.2) 46.124,-23.176 ccw(c47.149,-24.2) LED17.K@45.7,-24.2
PA13: IC2.14 J2.4 | length 81
  Top Layer w0.2: IC2.14@-59.463,-5.7 ccw(c-58.627,-5.529) -58.848,-6.353 ; IC2.14@-59.267,-5.66 ccw(c-58.273,-5.457) -58.536,-6.437 ; IC2.14@-59.121,-5.68 cw(c-59.128,-6.294) -58.535,-6.135 ; IC2.14@-59.12,-5.63 -57.85,-6.9 -54.231,-6.9 -33.4,13.931 -33.4,27.531 -31.531,29.4 -27.6,29.4 -26.748,30.252 J2.4@-26.748,35.648 ; IC2.14@-59.09,-5.483 cw(c-59.293,-6.477) -58.313,-6.214 ; IC2.14@-59.07,-5.629 ccw(c-58.456,-5.622) -58.615,-6.215 ; IC2.14@-59.05,-5.287 cw(c-59.221,-6.123) -58.397,-5.902 ; -58.352,-6.398 cw(c-57.584,-5.63) -58.67,-5.63 ccw(c-57.584,-5.63) -58.352,-6.398 ; -58.352,-6.398 ccw(c-59.12,-7.166) -59.12,-6.08 cw(c-59.12,-7.166) -58.352,-6.398 ; -58.01,-6.74 cw(c-56.901,-5.63) -58.47,-5.63 ccw(c-56.901,-5.63) -58.01,-6.74 ; -58.01,-6.74 ccw(c-59.12,-7.849) -59.12,-6.28 cw(c-59.12,-7.849) -58.01,-6.74 ; -26.748,34.212 cw(c-25.662,34.212) -26.43,34.98 ccw(c-25.662,34.212) -26.748,34.212 ; -26.748,34.212 ccw(c-27.834,34.212) -27.066,34.98 cw(c-27.834,34.212) -26.748,34.212 ; -26.748,34.694 cw(c-26.144,34.694) -26.571,35.121 ccw(c-26.144,34.694) -26.748,34.694 ; -26.748,34.694 ccw(c-27.352,34.694) -26.925,35.121 cw(c-27.352,34.694) -26.748,34.694
PA14: IC2.13 J2.5 | length 67.5
  Top Layer w0.2: IC2.13@-56.58,-5.63 -53.527,-5.63 -33.8,14.097 -33.8,27.697 -31.697,29.8 -28.4,29.8 -27.764,30.436 J2.5@-27.764,32.6 ; -55.494,-5.63 cw(c-55.494,-4.544) -56.262,-5.312 ccw(c-55.494,-4.544) -55.494,-5.63 ; -55.494,-5.63 ccw(c-55.494,-6.716) -56.262,-5.948 cw(c-55.494,-6.716) -55.494,-5.63 ; -55.011,-5.63 cw(c-55.011,-4.061) -56.12,-5.17 ccw(c-55.011,-4.061) -55.011,-5.63 ; -55.011,-5.63 ccw(c-55.011,-7.199) -56.12,-6.09 cw(c-55.011,-7.199) -55.011,-5.63 ; -27.764,31.164 cw(c-26.678,31.164) -27.446,31.932 ccw(c-26.678,31.164) -27.764,31.164 ; -27.764,31.164 ccw(c-28.85,31.164) -28.082,31.932 cw(c-28.85,31.164) -27.764,31.164 ; -27.764,31.646 cw(c-27.16,31.646) -27.587,32.073 ccw(c-27.16,31.646) -27.764,31.646 ; -27.764,31.646 ccw(c-28.368,31.646) -27.941,32.073 cw(c-28.368,31.646) -27.764,31.646
PB0: IC2.32 LED36.K U26.4 | length 73.2
  Top Layer w0.2: IC2.32@-11.66,-5.63 -8.996,-5.63 2.634,6 8,6 ; v1(8,5.1) 8,6 ; U26.4@11.9,3.3 11.9,5.1 ; -10.574,-5.63 cw(c-10.574,-4.544) -11.342,-5.312 ccw(c-10.574,-4.544) -10.574,-5.63 ; -10.574,-5.63 ccw(c-10.574,-6.716) -11.342,-5.948 cw(c-10.574,-6.716) -10.574,-5.63 ; -10.091,-5.63 cw(c-10.091,-4.061) -11.2,-5.17 ccw(c-10.091,-4.061) -10.091,-5.63 ; -10.091,-5.63 ccw(c-10.091,-7.199) -11.2,-6.09 cw(c-10.091,-7.199) -10.091,-5.63 ; 8,5.583 cw(c7.517,5.583) 7.859,5.241 ccw(c7.517,5.583) 8,5.583 ; 8,5.583 ccw(c8.483,5.583) 8.141,5.241 cw(c8.483,5.583) 8,5.583 ; 8,6 11,6 11.9,5.1 ; 11.9,4.746 cw(c11.421,4.746) 11.668,4.336 ccw(c11.421,4.746) 11.9,4.746 ; 11.9,4.746 ccw(c12.379,4.746) 12.132,4.336 cw(c12.379,4.746) 11.9,4.746 ; 11.9,5.1 cw(c11.208,5.1) 11.565,4.507 ccw(c11.208,5.1) 11.9,5.1 ; 11.9,5.1 ccw(c12.592,5.1) 12.235,4.507 cw(c12.592,5.1) 11.9,5.1
  Bottom Layer w0.2: LED36.K@0,24.2 0,13.1 v1(8,5.1) ; 0,23.215 cw(c0.985,23.215) 0.288,23.912 ccw(c0.985,23.215) 0,23.215 ; 0,23.215 ccw(c-0.985,23.215) -0.288,23.912 cw(c-0.985,23.215) 0,23.215 ; 7.659,5.441 cw(c7.317,5.1) 7.8,5.1 ccw(c7.317,5.1) 7.659,5.441 ; 7.659,5.441 ccw(c8,5.783) 8,5.3 cw(c8,5.783) 7.659,5.441
PB1: IC2.33 LED37.K U27.4 | length 83.5
  Top Layer w0.2: IC2.33@-14.543,-8.1 cw(c-13.707,-8.271) -13.928,-7.447 ; IC2.33@-14.347,-8.14 cw(c-13.353,-8.343) -13.616,-7.363 ; IC2.33@-14.201,-8.12 ccw(c-14.208,-7.506) -13.615,-7.665 ; IC2.33@-14.2,-8.17 -13.03,-7 -9.8,-7 -1.4,1.4 ; IC2.33@-14.17,-8.317 ccw(c-14.373,-7.323) -13.393,-7.586 ; IC2.33@-14.15,-8.171 cw(c-13.536,-8.178) -13.695,-7.585 ; IC2.33@-14.13,-8.513 ccw(c-14.301,-7.677) -13.477,-7.898 ; -0.868,0.852 ccw(c-0.53,0.942) v1(-0.6,0.6) ; -0.852,0.868 cw(c-0.942,0.53) v1(-0.6,0.6) ; U27.4@6.4,3.3 6.4,5.3 ; -13.432,-7.402 cw(c-14.2,-6.634) -14.2,-7.72 ccw(c-14.2,-6.634) -13.432,-7.402 ; -13.432,-7.402 ccw(c-12.664,-8.17) -13.75,-8.17 cw(c-12.664,-8.17) -13.432,-7.402 ; -13.09,-7.06 cw(c-14.2,-5.951) -14.2,-7.52 ccw(c-14.2,-5.951) -13.09,-7.06 ; -13.09,-7.06 ccw(c-11.981,-8.17) -13.55,-8.17 cw(c-11.981,-8.17) -13.09,-7.06 ; -1.4,1.4 2.8,5.6 6.1,5.6 6.4,5.3 ; -1.4,1.4 v1(-0.6,0.6) ; -0.941,0.941 cw(c-1.283,0.6) -0.8,0.6 ccw(c-1.283,0.6) -0.941,0.941 ; -0.941,0.941 ccw(c-0.6,1.283) -0.6,0.8 cw(c-0.6,1.283) -0.941,0.941 ; 6.4,4.885 cw(c5.655,4.885) 6.119,4.302 ccw(c5.655,4.885) 6.4,4.885 ; 6.4,4.885 ccw(c7.145,4.885) 6.681,4.302 cw(c7.145,4.885) 6.4,4.885 ; 6.4,5.3 cw(c5.323,5.3) 5.995,4.458 ccw(c5.323,5.3) 6.4,5.3 ; 6.4,5.3 ccw(c7.477,5.3) 6.805,4.458 cw(c7.477,5.3) 6.4,5.3
  Bottom Layer w0.2: LED37.K@-7.5,24.2 -7.5,17.7 -0.6,10.8 v1(-0.6,0.6) ; -7.5,23.215 cw(c-6.515,23.215) -7.212,23.912 ccw(c-6.515,23.215) -7.5,23.215 ; -7.5,23.215 ccw(c-8.485,23.215) -7.788,23.912 cw(c-8.485,23.215) -7.5,23.215 ; -0.6,1.083 cw(c-1.083,1.083) -0.741,0.741 ccw(c-1.083,1.083) -0.6,1.083 ; -0.6,1.083 ccw(c-0.117,1.083) -0.459,0.741 cw(c-0.117,1.083) -0.6,1.083
PB8: IC2.6 S1.1 | length 95.5
  Top Layer w0.2: IC2.6@-59.463,-15.72 cw(c-58.627,-15.891) -58.848,-15.067 ; IC2.6@-59.267,-15.76 cw(c-58.273,-15.963) -58.536,-14.983 ; IC2.6@-59.121,-15.74 ccw(c-59.128,-15.126) -58.535,-15.285 ; IC2.6@-59.12,-15.79 -57.93,-14.6 -55.6,-14.6 -46.8,-23.4 -20.112,-23.4 -12.312,-31.2 -2.44,-31.2 S1.1@1.05,-34.69 ; IC2.6@-59.09,-15.937 ccw(c-59.293,-14.943) -58.313,-15.206 ; IC2.6@-59.07,-15.791 cw(c-58.456,-15.798) -58.615,-15.205 ; IC2.6@-59.05,-16.133 ccw(c-59.221,-15.297) -58.397,-15.518 ; 0.243,-34.106 ccw(c1.223,-33.843) S1.1@1.02,-34.837 ; S1.1@0.327,-34.418 ccw(c1.151,-34.197) S1.1@0.98,-35.033 ; 0.466,-33.883 cw(c0.203,-34.863) S1.1@1.197,-34.66 ; S1.1@0.778,-33.967 cw(c0.557,-34.791) S1.1@1.393,-34.62 ; -58.352,-15.022 cw(c-59.12,-14.254) -59.12,-15.34 ccw(c-59.12,-14.254) -58.352,-15.022 ; -58.352,-15.022 ccw(c-57.584,-15.79) -58.67,-15.79 cw(c-57.584,-15.79) -58.352,-15.022 ; -58.01,-14.68 cw(c-59.12,-13.571) -59.12,-15.14 ccw(c-59.12,-13.571) -58.01,-14.68 ; -58.01,-14.68 ccw(c-56.901,-15.79) -58.47,-15.79 cw(c-56.901,-15.79) -58.01,-14.68 ; -0.06,-33.58 cw(c-1.169,-34.69) 0.4,-34.69 ccw(c-1.169,-34.69) -0.06,-33.58 ; -0.06,-33.58 ccw(c1.05,-32.471) 1.05,-34.04 cw(c1.05,-32.471) -0.06,-33.58 ; 0.282,-33.922 cw(c-0.486,-34.69) 0.6,-34.69 ccw(c-0.486,-34.69) 0.282,-33.922 ; 0.282,-33.922 ccw(c1.05,-33.154) 1.05,-34.24 cw(c1.05,-33.154) 0.282,-33.922